# Altium PCB LedMatrix.PcbDoc (part 2 of 3)
Units mm, origin at the board's own origin, x right, y up, seen from the top; angles counter-clockwise.
Board outline 35.93 x 53 mm, 2 copper layers (Top Layer, Bottom Layer), stack 1.611 mm thick; 215 components, 212 nets, 670 pads, 259 vias.
Unrouted connection lines stored in the file: 107.
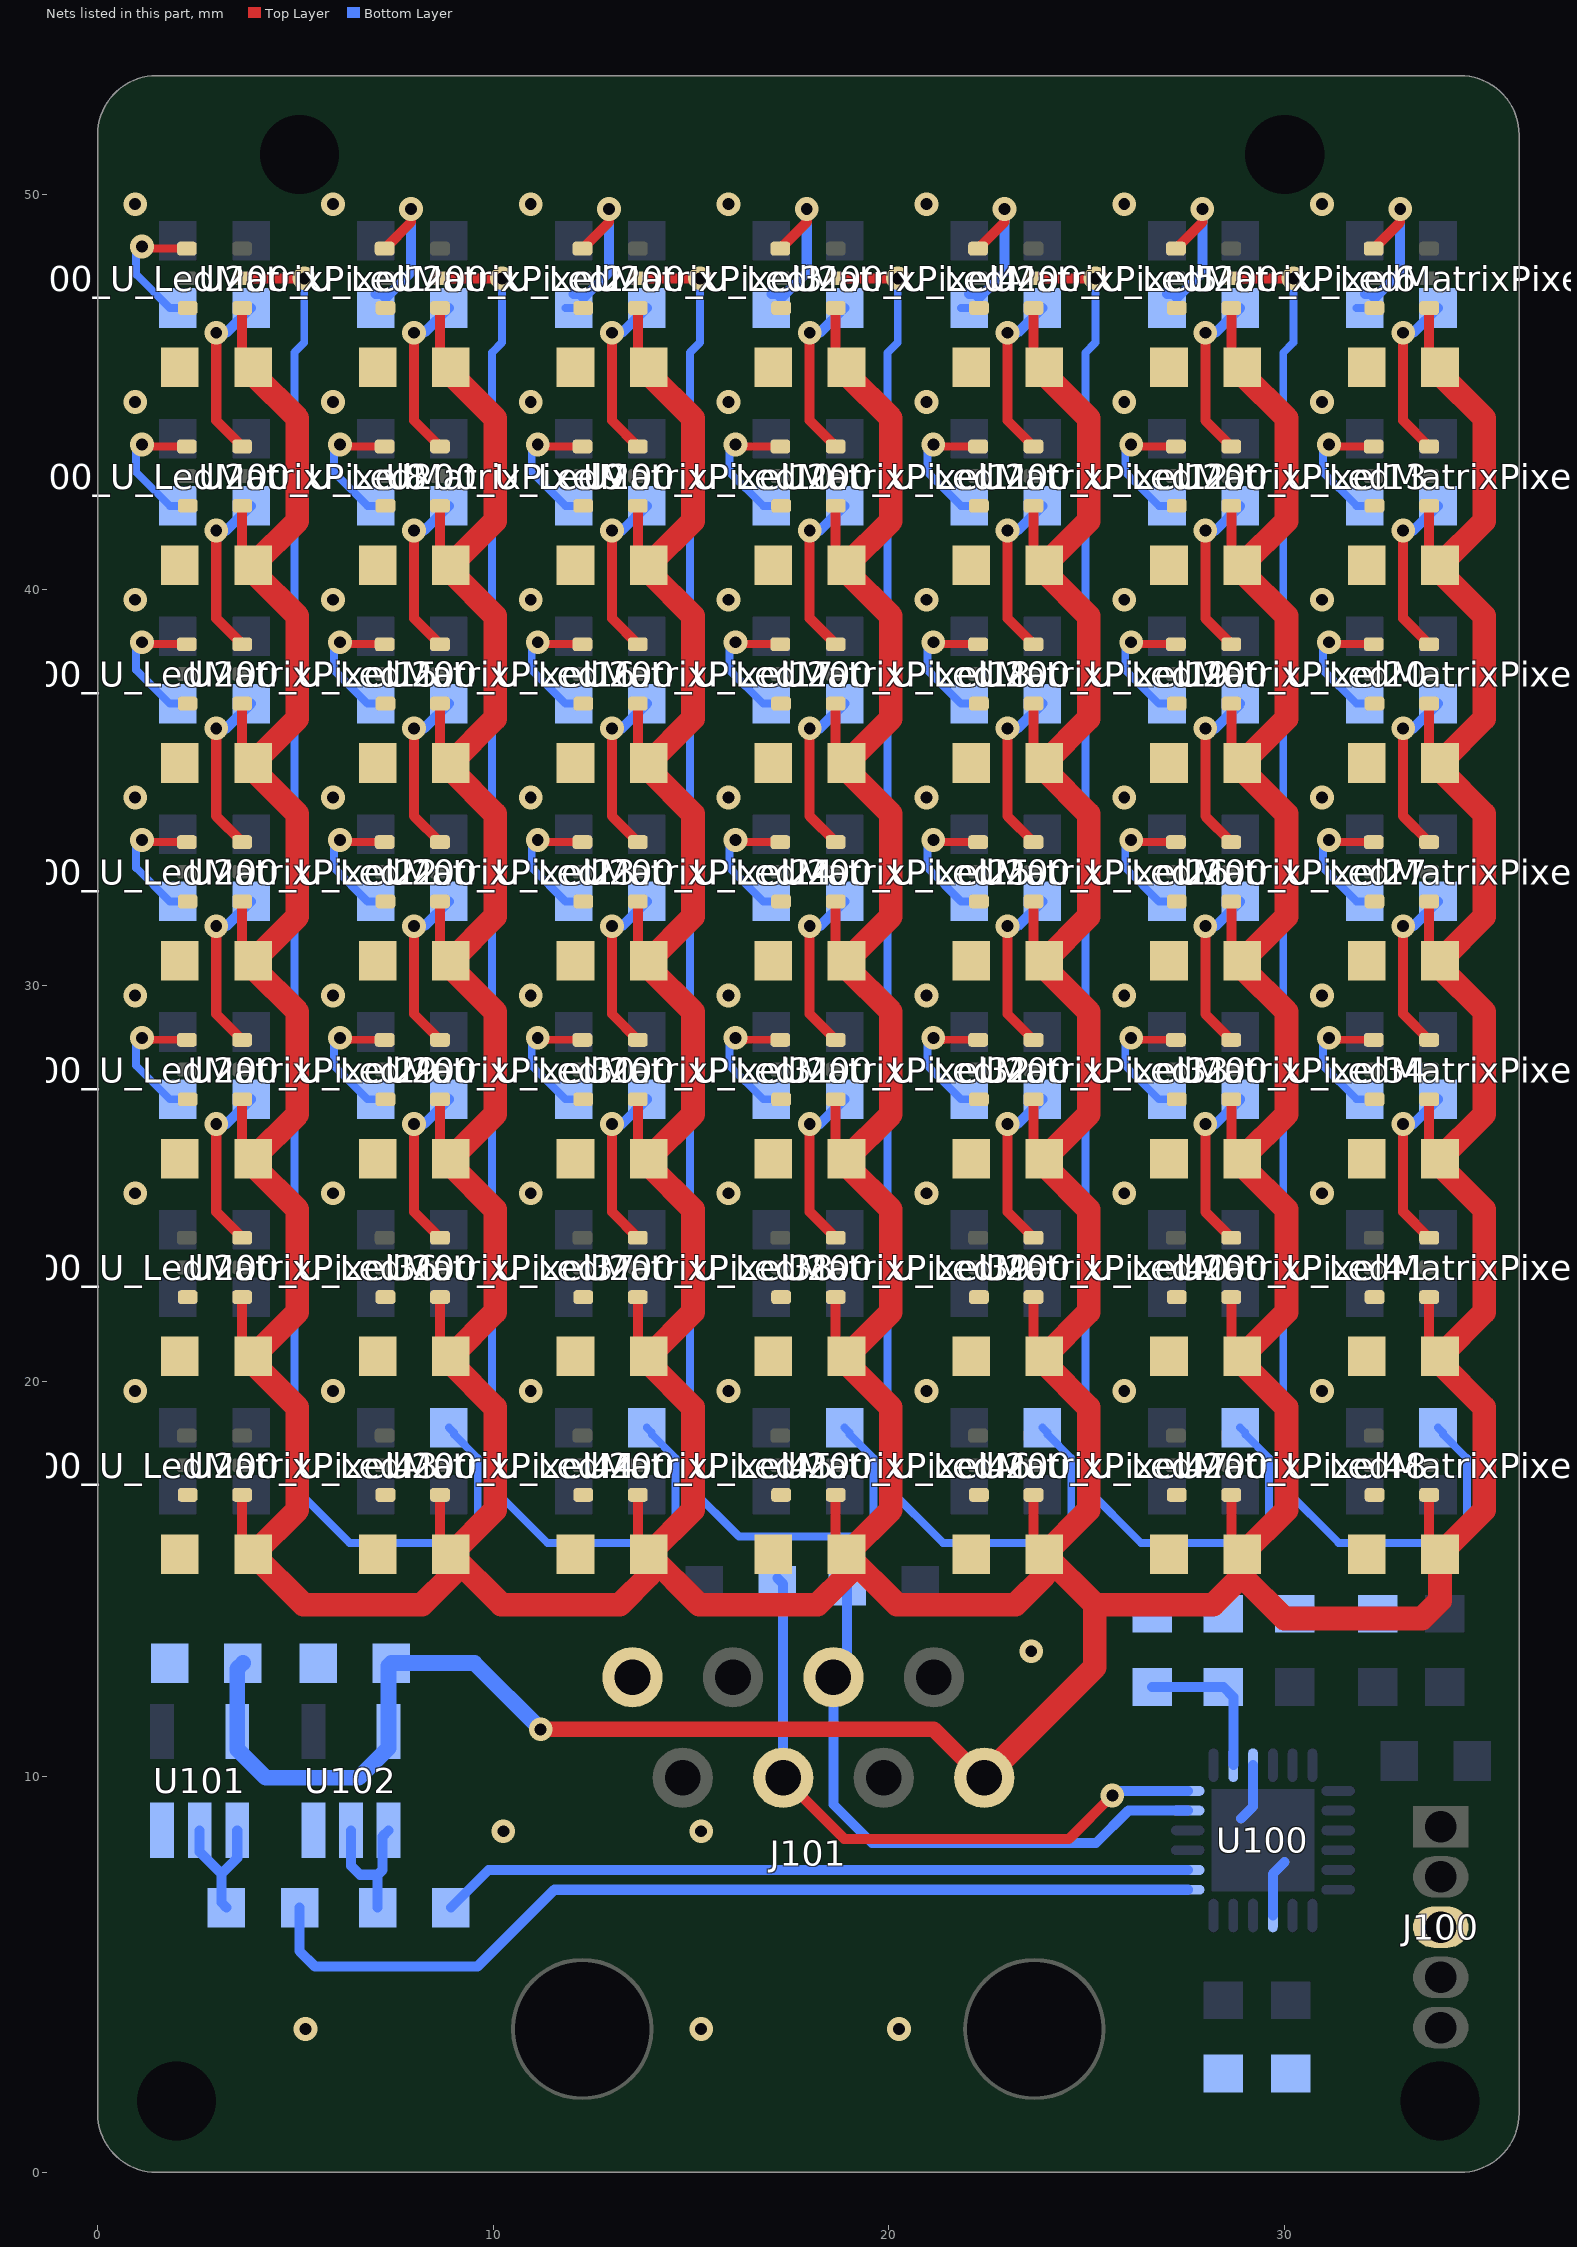
[diagram p2: the nets of this part, all layers, seen from the top]

## Via types
v1: diameter 0.6, hole 0.3, Top Layer to Bottom Layer, tented both sides, 255 vias
v2: diameter 0.5, hole 0.2, Top Layer to Bottom Layer, tented both sides, 4 vias

## Nets (pads, with @x,y where several pads share a name; then routed paths per layer and width w, separated by ;. In a path a pad name is that pad's centre, name@x,y a point inside that pad or via, vN(x,y) a via of type N, cw(c..) or ccw(c..) an arc to the next point about the centre after c; other vN are vias at no path point) (continued)
5V: C107.2 C108.2 C200_U_LedMatrixPixel1.2 C200_U_LedMatrixPixel2.2 C200_U_LedMatrixPixel3.2 C200_U_LedMatrixPixel4.2 C200_U_LedMatrixPixel5.2 C200_U_LedMatrixPixel6.2 C200_U_LedMatrixPixel7.2 C200_U_LedMatrixPixel8.2 C200_U_LedMatrixPixel9.2 C200_U_LedMatrixPixel10.2 C200_U_LedMatrixPixel11.2 C200_U_LedMatrixPixel12.2 C200_U_LedMatrixPixel13.2 C200_U_LedMatrixPixel14.2 C200_U_LedMatrixPixel15.2 C200_U_LedMatrixPixel16.2 C200_U_LedMatrixPixel17.2 C200_U_LedMatrixPixel18.2 C200_U_LedMatrixPixel19.2 C200_U_LedMatrixPixel20.2 C200_U_LedMatrixPixel21.2 C200_U_LedMatrixPixel22.2 C200_U_LedMatrixPixel23.2 C200_U_LedMatrixPixel24.2 C200_U_LedMatrixPixel25.2 C200_U_LedMatrixPixel26.2 C200_U_LedMatrixPixel27.2 C200_U_LedMatrixPixel28.2 C200_U_LedMatrixPixel29.2 C200_U_LedMatrixPixel30.2 C200_U_LedMatrixPixel31.2 C200_U_LedMatrixPixel32.2 C200_U_LedMatrixPixel33.2 C200_U_LedMatrixPixel34.2 C200_U_LedMatrixPixel35.2 C200_U_LedMatrixPixel36.2 C200_U_LedMatrixPixel37.2 C200_U_LedMatrixPixel38.2 C200_U_LedMatrixPixel39.2 C200_U_LedMatrixPixel40.2 C200_U_LedMatrixPixel41.2 C200_U_LedMatrixPixel42.2 C200_U_LedMatrixPixel43.2 C200_U_LedMatrixPixel44.2 C200_U_LedMatrixPixel45.2 C200_U_LedMatrixPixel46.2 C200_U_LedMatrixPixel47.2 C200_U_LedMatrixPixel48.2 C200_U_LedMatrixPixel49.2 J101.1 U101.5 U102.5 U200_U_LedMatrixPixel1.4 U200_U_LedMatrixPixel2.4 U200_U_LedMatrixPixel3.4 U200_U_LedMatrixPixel4.4 U200_U_LedMatrixPixel5.4 U200_U_LedMatrixPixel6.4 U200_U_LedMatrixPixel7.4 U200_U_LedMatrixPixel8.4 U200_U_LedMatrixPixel9.4 U200_U_LedMatrixPixel10.4 U200_U_LedMatrixPixel11.4 U200_U_LedMatrixPixel12.4 U200_U_LedMatrixPixel13.4 U200_U_LedMatrixPixel14.4 U200_U_LedMatrixPixel15.4 U200_U_LedMatrixPixel16.4 U200_U_LedMatrixPixel17.4 U200_U_LedMatrixPixel18.4 U200_U_LedMatrixPixel19.4 U200_U_LedMatrixPixel20.4 U200_U_LedMatrixPixel21.4 U200_U_LedMatrixPixel22.4 U200_U_LedMatrixPixel23.4 U200_U_LedMatrixPixel24.4 U200_U_LedMatrixPixel25.4 U200_U_LedMatrixPixel26.4 U200_U_LedMatrixPixel27.4 U200_U_LedMatrixPixel28.4 U200_U_LedMatrixPixel29.4 U200_U_LedMatrixPixel30.4 U200_U_LedMatrixPixel31.4 U200_U_LedMatrixPixel32.4 U200_U_LedMatrixPixel33.4 U200_U_LedMatrixPixel34.4 U200_U_LedMatrixPixel35.4 U200_U_LedMatrixPixel36.4 U200_U_LedMatrixPixel37.4 U200_U_LedMatrixPixel38.4 U200_U_LedMatrixPixel39.4 U200_U_LedMatrixPixel40.4 U200_U_LedMatrixPixel41.4 U200_U_LedMatrixPixel42.4 U200_U_LedMatrixPixel43.4 U200_U_LedMatrixPixel44.4 U200_U_LedMatrixPixel45.4 U200_U_LedMatrixPixel46.4 U200_U_LedMatrixPixel47.4 U200_U_LedMatrixPixel48.4 U200_U_LedMatrixPixel49.4 | length 382
  Top Layer w0.254: U200_U_LedMatrixPixel43.4@3.656,17.125 3.656,15.9 C200_U_LedMatrixPixel43.2@3.931,15.625 ; C200_U_LedMatrixPixel36.2@3.656,20.9 U200_U_LedMatrixPixel36.4@3.656,22.125 ; C200_U_LedMatrixPixel29.2@3.656,25.9 U200_U_LedMatrixPixel29.4@3.656,27.125 ; C200_U_LedMatrixPixel22.2@3.656,30.9 U200_U_LedMatrixPixel22.4@3.656,32.125 ; C200_U_LedMatrixPixel15.2@3.656,35.9 U200_U_LedMatrixPixel15.4@3.656,37.125 ; C200_U_LedMatrixPixel8.2@3.656,40.9 U200_U_LedMatrixPixel8.4@3.656,42.125 ; C200_U_LedMatrixPixel1.2@3.656,45.9 U200_U_LedMatrixPixel1.4@3.656,47.125 ; U200_U_LedMatrixPixel44.4@8.656,17.125 8.656,15.9 C200_U_LedMatrixPixel44.2@8.931,15.625 ; C200_U_LedMatrixPixel37.2@8.656,20.9 U200_U_LedMatrixPixel37.4@8.656,22.125 ; C200_U_LedMatrixPixel30.2@8.656,25.9 U200_U_LedMatrixPixel30.4@8.656,27.125 ; C200_U_LedMatrixPixel23.2@8.656,30.9 U200_U_LedMatrixPixel23.4@8.656,32.125 ; C200_U_LedMatrixPixel16.2@8.656,35.9 U200_U_LedMatrixPixel16.4@8.656,37.125 ; C200_U_LedMatrixPixel9.2@8.656,40.9 U200_U_LedMatrixPixel9.4@8.656,42.125 ; C200_U_LedMatrixPixel2.2@8.656,45.9 U200_U_LedMatrixPixel2.4@8.656,47.125 ; U200_U_LedMatrixPixel45.4@13.656,17.125 13.656,15.9 C200_U_LedMatrixPixel45.2@13.931,15.625 ; C200_U_LedMatrixPixel38.2@13.656,20.9 U200_U_LedMatrixPixel38.4@13.656,22.125 ; C200_U_LedMatrixPixel31.2@13.656,25.9 U200_U_LedMatrixPixel31.4@13.656,27.125 ; C200_U_LedMatrixPixel24.2@13.656,30.9 U200_U_LedMatrixPixel24.4@13.656,32.125 ; C200_U_LedMatrixPixel17.2@13.656,35.9 U200_U_LedMatrixPixel17.4@13.656,37.125 ; C200_U_LedMatrixPixel10.2@13.656,40.9 U200_U_LedMatrixPixel10.4@13.656,42.125 ; C200_U_LedMatrixPixel3.2@13.656,45.9 U200_U_LedMatrixPixel3.4@13.656,47.125 ; U200_U_LedMatrixPixel46.4@18.656,17.125 18.656,15.9 C200_U_LedMatrixPixel46.2@18.931,15.625 ; C200_U_LedMatrixPixel39.2@18.656,20.9 U200_U_LedMatrixPixel39.4@18.656,22.125 ; C200_U_LedMatrixPixel32.2@18.656,25.9 U200_U_LedMatrixPixel32.4@18.656,27.125 ; C200_U_LedMatrixPixel25.2@18.656,30.9 U200_U_LedMatrixPixel25.4@18.656,32.125 ; C200_U_LedMatrixPixel18.2@18.656,35.9 U200_U_LedMatrixPixel18.4@18.656,37.125 ; C200_U_LedMatrixPixel11.2@18.656,40.9 U200_U_LedMatrixPixel11.4@18.656,42.125 ; C200_U_LedMatrixPixel4.2@18.656,45.9 U200_U_LedMatrixPixel4.4@18.656,47.125 ; U200_U_LedMatrixPixel47.4@23.656,17.125 23.656,15.9 C200_U_LedMatrixPixel47.2@23.931,15.625 ; C200_U_LedMatrixPixel40.2@23.656,20.9 U200_U_LedMatrixPixel40.4@23.656,22.125 ; C200_U_LedMatrixPixel33.2@23.656,25.9 U200_U_LedMatrixPixel33.4@23.656,27.125 ; C200_U_LedMatrixPixel26.2@23.656,30.9 U200_U_LedMatrixPixel26.4@23.656,32.125 ; C200_U_LedMatrixPixel19.2@23.656,35.9 U200_U_LedMatrixPixel19.4@23.656,37.125 ; C200_U_LedMatrixPixel12.2@23.656,40.9 U200_U_LedMatrixPixel12.4@23.656,42.125 ; C200_U_LedMatrixPixel5.2@23.656,45.9 U200_U_LedMatrixPixel5.4@23.656,47.125 ; U200_U_LedMatrixPixel48.4@28.656,17.125 28.656,15.9 C200_U_LedMatrixPixel48.2@28.931,15.625 ; C200_U_LedMatrixPixel41.2@28.656,20.9 U200_U_LedMatrixPixel41.4@28.656,22.125 ; C200_U_LedMatrixPixel34.2@28.656,25.9 U200_U_LedMatrixPixel34.4@28.656,27.125 ; C200_U_LedMatrixPixel27.2@28.656,30.9 U200_U_LedMatrixPixel27.4@28.656,32.125 ; C200_U_LedMatrixPixel20.2@28.656,35.9 U200_U_LedMatrixPixel20.4@28.656,37.125 ; C200_U_LedMatrixPixel13.2@28.656,40.9 U200_U_LedMatrixPixel13.4@28.656,42.125 ; C200_U_LedMatrixPixel6.2@28.656,45.9 U200_U_LedMatrixPixel6.4@28.656,47.125 ; C200_U_LedMatrixPixel49.2@33.931,15.625 C200_U_LedMatrixPixel49.2@33.656,15.9 ; C200_U_LedMatrixPixel49.2@33.656,15.9 U200_U_LedMatrixPixel49.4@33.656,17.125 C200_U_LedMatrixPixel49.2@33.656,15.9 ; C200_U_LedMatrixPixel42.2@33.656,20.9 U200_U_LedMatrixPixel42.4@33.656,22.125 C200_U_LedMatrixPixel42.2@33.656,20.9 ; C200_U_LedMatrixPixel35.2@33.656,25.9 U200_U_LedMatrixPixel35.4@33.656,27.125 C200_U_LedMatrixPixel35.2@33.656,25.9 ; C200_U_LedMatrixPixel28.2@33.656,30.9 U200_U_LedMatrixPixel28.4@33.656,32.125 C200_U_LedMatrixPixel28.2@33.656,30.9 ; C200_U_LedMatrixPixel21.2@33.656,35.9 U200_U_LedMatrixPixel21.4@33.656,37.125 C200_U_LedMatrixPixel21.2@33.656,35.9 ; C200_U_LedMatrixPixel14.2@33.656,40.9 U200_U_LedMatrixPixel14.4@33.656,42.125 C200_U_LedMatrixPixel14.2@33.656,40.9 ; C200_U_LedMatrixPixel7.2@33.656,45.9 U200_U_LedMatrixPixel7.4@33.656,47.125 C200_U_LedMatrixPixel7.2@33.656,45.9
  Top Layer w0.4: v1(11.2,11.2) 21.135,11.2 22.36,9.975 J101.1@22.41,9.975
  Top Layer w0.6: C200_U_LedMatrixPixel36.2@3.931,20.458 5.05,19.339 5.05,16.744 C200_U_LedMatrixPixel43.2@3.931,15.625 5.206,14.35 8.2,14.35 8.931,15.081 C200_U_LedMatrixPixel44.2@8.931,15.625 ; C200_U_LedMatrixPixel36.2@3.931,20.625 5.05,21.744 5.05,24.339 C200_U_LedMatrixPixel29.2@3.931,25.458 ; C200_U_LedMatrixPixel29.2@3.931,25.625 5.05,26.744 5.05,29.339 C200_U_LedMatrixPixel22.2@3.931,30.458 ; C200_U_LedMatrixPixel22.2@3.931,30.625 5.05,31.744 5.05,34.339 C200_U_LedMatrixPixel15.2@3.931,35.458 ; C200_U_LedMatrixPixel15.2@3.931,35.625 5.05,36.744 5.05,39.339 C200_U_LedMatrixPixel8.2@3.931,40.458 ; C200_U_LedMatrixPixel8.2@3.931,40.625 5.05,41.744 5.05,44.339 3.931,45.458 C200_U_LedMatrixPixel1.2@3.931,45.625 ; C200_U_LedMatrixPixel37.2@8.931,20.458 10.05,19.339 10.05,16.744 C200_U_LedMatrixPixel44.2@8.931,15.625 ; C200_U_LedMatrixPixel37.2@8.931,20.625 10.05,21.744 10.05,24.339 C200_U_LedMatrixPixel30.2@8.931,25.458 ; C200_U_LedMatrixPixel30.2@8.931,25.625 10.05,26.744 10.05,29.339 C200_U_LedMatrixPixel23.2@8.931,30.458 ; C200_U_LedMatrixPixel23.2@8.931,30.625 10.05,31.744 10.05,34.339 C200_U_LedMatrixPixel16.2@8.931,35.458 ; C200_U_LedMatrixPixel16.2@8.931,35.625 10.05,36.744 10.05,39.339 C200_U_LedMatrixPixel9.2@8.931,40.458 ; C200_U_LedMatrixPixel9.2@8.931,40.625 10.05,41.744 10.05,44.339 8.931,45.458 C200_U_LedMatrixPixel2.2@8.931,45.625 ; 13.931,15.081 13.2,14.35 10.206,14.35 C200_U_LedMatrixPixel44.2@8.931,15.625 ; C200_U_LedMatrixPixel38.2@13.931,20.458 15.05,19.339 15.05,16.744 C200_U_LedMatrixPixel45.2@13.931,15.625 15.206,14.35 18.2,14.35 18.931,15.081 ; C200_U_LedMatrixPixel38.2@13.931,20.625 15.05,21.744 15.05,24.339 C200_U_LedMatrixPixel31.2@13.931,25.458 ; C200_U_LedMatrixPixel31.2@13.931,25.625 15.05,26.744 15.05,29.339 C200_U_LedMatrixPixel24.2@13.931,30.458 ; C200_U_LedMatrixPixel24.2@13.931,30.625 15.05,31.744 15.05,34.339 C200_U_LedMatrixPixel17.2@13.931,35.458 ; C200_U_LedMatrixPixel17.2@13.931,35.625 15.05,36.744 15.05,39.339 C200_U_LedMatrixPixel10.2@13.931,40.458 ; C200_U_LedMatrixPixel10.2@13.931,40.625 15.05,41.744 15.05,44.339 13.931,45.458 C200_U_LedMatrixPixel3.2@13.931,45.625 ; C200_U_LedMatrixPixel39.2@18.931,20.458 20.05,19.339 20.05,16.744 C200_U_LedMatrixPixel46.2@18.931,15.625 20.206,14.35 23.2,14.35 23.931,15.081 ; C200_U_LedMatrixPixel39.2@18.931,20.625 20.05,21.744 20.05,24.339 C200_U_LedMatrixPixel32.2@18.931,25.458 ; C200_U_LedMatrixPixel32.2@18.931,25.625 20.05,26.744 20.05,29.339 C200_U_LedMatrixPixel25.2@18.931,30.458 ; C200_U_LedMatrixPixel25.2@18.931,30.625 20.05,31.744 20.05,34.339 C200_U_LedMatrixPixel18.2@18.931,35.458 ; C200_U_LedMatrixPixel18.2@18.931,35.625 20.05,36.744 20.05,39.339 C200_U_LedMatrixPixel11.2@18.931,40.458 ; C200_U_LedMatrixPixel11.2@18.931,40.625 20.05,41.744 20.05,44.339 18.931,45.458 C200_U_LedMatrixPixel4.2@18.931,45.625 ; J101.1@22.41,9.975 25.206,12.771 25.206,14.35 ; C200_U_LedMatrixPixel40.2@23.931,20.458 25.05,19.339 25.05,16.744 C200_U_LedMatrixPixel47.2@23.931,15.625 25.206,14.35 ; C200_U_LedMatrixPixel40.2@23.931,20.625 25.05,21.744 25.05,24.339 C200_U_LedMatrixPixel33.2@23.931,25.458 ; C200_U_LedMatrixPixel33.2@23.931,25.625 25.05,26.744 25.05,29.339 C200_U_LedMatrixPixel26.2@23.931,30.458 ; C200_U_LedMatrixPixel26.2@23.931,30.625 25.05,31.744 25.05,34.339 C200_U_LedMatrixPixel19.2@23.931,35.458 ; C200_U_LedMatrixPixel19.2@23.931,35.625 25.05,36.744 25.05,39.339 C200_U_LedMatrixPixel12.2@23.931,40.458 ; C200_U_LedMatrixPixel12.2@23.931,40.625 25.05,41.744 25.05,44.339 23.931,45.458 C200_U_LedMatrixPixel5.2@23.931,45.625 ; 28.931,15.069 30,14 33.479,14 33.931,14.452 C200_U_LedMatrixPixel49.2@33.931,15.625 35.05,16.744 35.05,19.339 C200_U_LedMatrixPixel42.2@33.931,20.458 ; C200_U_LedMatrixPixel41.2@28.931,20.458 30.05,19.339 30.05,16.744 C200_U_LedMatrixPixel48.2@28.931,15.625 28.931,15.081 28.2,14.35 25.206,14.35 ; C200_U_LedMatrixPixel41.2@28.931,20.625 30.05,21.744 30.05,24.339 C200_U_LedMatrixPixel34.2@28.931,25.458 ; C200_U_LedMatrixPixel34.2@28.931,25.625 30.05,26.744 30.05,29.339 C200_U_LedMatrixPixel27.2@28.931,30.458 ; C200_U_LedMatrixPixel27.2@28.931,30.625 30.05,31.744 30.05,34.339 C200_U_LedMatrixPixel20.2@28.931,35.458 ; C200_U_LedMatrixPixel20.2@28.931,35.625 30.05,36.744 30.05,39.339 C200_U_LedMatrixPixel13.2@28.931,40.458 ; C200_U_LedMatrixPixel13.2@28.931,40.625 30.05,41.744 30.05,44.339 28.931,45.458 C200_U_LedMatrixPixel6.2@28.931,45.625 ; C200_U_LedMatrixPixel42.2@33.931,20.625 35.05,21.744 35.05,24.339 C200_U_LedMatrixPixel35.2@33.931,25.458 ; C200_U_LedMatrixPixel35.2@33.931,25.625 35.05,26.744 35.05,29.339 C200_U_LedMatrixPixel28.2@33.931,30.458 ; C200_U_LedMatrixPixel28.2@33.931,30.625 35.05,31.744 35.05,34.339 C200_U_LedMatrixPixel21.2@33.931,35.458 ; C200_U_LedMatrixPixel21.2@33.931,35.625 35.05,36.744 35.05,39.339 C200_U_LedMatrixPixel14.2@33.931,40.458 ; C200_U_LedMatrixPixel14.2@33.931,40.625 35.05,41.744 35.05,44.339 33.931,45.458 C200_U_LedMatrixPixel7.2@33.931,45.625
  Bottom Layer w0.4: C108.2@3.675,12.875 3.531,12.731 U101.5@3.531,11.145 3.531,10.694 4.25,9.975 6.6,9.975 7.356,10.731 U102.5@7.356,11.145 7.356,12.806 C107.2@7.425,12.875 9.525,12.875 v1(11.2,11.2)
CKO8: R201_U_LedMatrixPixel44.1 U200_U_LedMatrixPixel1.5 | length 40.3
  Top Layer w0.254: U200_U_LedMatrixPixel1.5@3.656,47.875 v1(5.225,47.875)
  Bottom Layer w0.2: v1(5.225,47.875) 5.225,46.25 4.973,45.998 4.973,17.31 6.37,15.913 9.004,15.913 9.61,16.52 9.61,18.054 9.008,18.656 9.008,18.698 R201_U_LedMatrixPixel44.1@8.881,18.825
CKO16: R201_U_LedMatrixPixel45.1 U200_U_LedMatrixPixel2.5 | length 40.3
  Top Layer w0.254: U200_U_LedMatrixPixel2.5@8.656,47.875 v1(10.225,47.875)
  Bottom Layer w0.2: v1(10.225,47.875) 10.225,46.25 9.975,46 9.975,17.308 11.37,15.913 14.004,15.913 14.61,16.52 14.61,18.054 14.008,18.656 14.008,18.698 R201_U_LedMatrixPixel45.1@13.881,18.825
CKO24: R201_U_LedMatrixPixel46.1 U200_U_LedMatrixPixel3.5 | length 40.2
  Top Layer w0.254: U200_U_LedMatrixPixel3.5@13.656,47.875 v1(15.225,47.875)
  Bottom Layer w0.2: v1(15.225,47.875) 15.225,46.25 14.975,46 14.975,17.308 16.212,16.071 19.161,16.071 19.61,16.52 19.61,18.054 19.008,18.656 19.008,18.698 R201_U_LedMatrixPixel46.1@18.881,18.825
CKO32: R201_U_LedMatrixPixel47.1 U200_U_LedMatrixPixel4.5 | length 40.3
  Top Layer w0.254: U200_U_LedMatrixPixel4.5@18.656,47.875 v1(20.225,47.875)
  Bottom Layer w0.2: v1(20.225,47.875) 20.225,46.25 19.968,45.993 19.968,17.315 21.37,15.913 24.004,15.913 24.61,16.52 24.61,18.054 24.008,18.656 24.008,18.698 R201_U_LedMatrixPixel47.1@23.881,18.825
CKO40: R201_U_LedMatrixPixel48.1 U200_U_LedMatrixPixel5.5 | length 40.3
  Top Layer w0.254: U200_U_LedMatrixPixel5.5@23.656,47.875 v1(25.225,47.875)
  Bottom Layer w0.2: v1(25.225,47.875) 25.225,46.25 24.968,45.993 24.968,17.315 26.37,15.913 29.004,15.913 29.61,16.52 29.61,18.054 29.008,18.656 29.008,18.698 R201_U_LedMatrixPixel48.1@28.881,18.825
CKO48: R201_U_LedMatrixPixel49.1 U200_U_LedMatrixPixel6.5 | length 40.3
  Top Layer w0.254: U200_U_LedMatrixPixel6.5@28.656,47.875 v1(30.225,47.875)
  Bottom Layer w0.2: v1(30.225,47.875) 30.225,46.25 29.968,45.993 29.968,17.315 31.37,15.913 34.004,15.913 34.61,16.52 34.61,18.054 34.008,18.656 34.008,18.698 R201_U_LedMatrixPixel49.1@33.881,18.825
GND: C100.1 C101.1 C102.1 C103.1 C104.1 C105.1 C107.1 C108.1 C200_U_LedMatrixPixel1.1 C200_U_LedMatrixPixel2.1 C200_U_LedMatrixPixel3.1 C200_U_LedMatrixPixel4.1 C200_U_LedMatrixPixel5.1 C200_U_LedMatrixPixel6.1 C200_U_LedMatrixPixel7.1 C200_U_LedMatrixPixel8.1 C200_U_LedMatrixPixel9.1 C200_U_LedMatrixPixel10.1 C200_U_LedMatrixPixel11.1 C200_U_LedMatrixPixel12.1 C200_U_LedMatrixPixel13.1 C200_U_LedMatrixPixel14.1 C200_U_LedMatrixPixel15.1 C200_U_LedMatrixPixel16.1 C200_U_LedMatrixPixel17.1 C200_U_LedMatrixPixel18.1 C200_U_LedMatrixPixel19.1 C200_U_LedMatrixPixel20.1 C200_U_LedMatrixPixel21.1 C200_U_LedMatrixPixel22.1 C200_U_LedMatrixPixel23.1 C200_U_LedMatrixPixel24.1 C200_U_LedMatrixPixel25.1 C200_U_LedMatrixPixel26.1 C200_U_LedMatrixPixel27.1 C200_U_LedMatrixPixel28.1 C200_U_LedMatrixPixel29.1 C200_U_LedMatrixPixel30.1 C200_U_LedMatrixPixel31.1 C200_U_LedMatrixPixel32.1 C200_U_LedMatrixPixel33.1 C200_U_LedMatrixPixel34.1 C200_U_LedMatrixPixel35.1 C200_U_LedMatrixPixel36.1 C200_U_LedMatrixPixel37.1 C200_U_LedMatrixPixel38.1 C200_U_LedMatrixPixel39.1 C200_U_LedMatrixPixel40.1 C200_U_LedMatrixPixel41.1 C200_U_LedMatrixPixel42.1 C200_U_LedMatrixPixel43.1 C200_U_LedMatrixPixel44.1 C200_U_LedMatrixPixel45.1 C200_U_LedMatrixPixel46.1 C200_U_LedMatrixPixel47.1 C200_U_LedMatrixPixel48.1 C200_U_LedMatrixPixel49.1 J100.3 J101.8 U100.9 U100.21 U101.3 U102.3 U200_U_LedMatrixPixel1.3 U200_U_LedMatrixPixel2.3 U200_U_LedMatrixPixel3.3 U200_U_LedMatrixPixel4.3 U200_U_LedMatrixPixel5.3 U200_U_LedMatrixPixel6.3 U200_U_LedMatrixPixel7.3 U200_U_LedMatrixPixel8.3 U200_U_LedMatrixPixel9.3 U200_U_LedMatrixPixel10.3 U200_U_LedMatrixPixel11.3 U200_U_LedMatrixPixel12.3 U200_U_LedMatrixPixel13.3 U200_U_LedMatrixPixel14.3 U200_U_LedMatrixPixel15.3 U200_U_LedMatrixPixel16.3 U200_U_LedMatrixPixel17.3 U200_U_LedMatrixPixel18.3 U200_U_LedMatrixPixel19.3 U200_U_LedMatrixPixel20.3 U200_U_LedMatrixPixel21.3 U200_U_LedMatrixPixel22.3 U200_U_LedMatrixPixel23.3 U200_U_LedMatrixPixel24.3 U200_U_LedMatrixPixel25.3 U200_U_LedMatrixPixel26.3 U200_U_LedMatrixPixel27.3 U200_U_LedMatrixPixel28.3 U200_U_LedMatrixPixel29.3 U200_U_LedMatrixPixel30.3 U200_U_LedMatrixPixel31.3 U200_U_LedMatrixPixel32.3 U200_U_LedMatrixPixel33.3 U200_U_LedMatrixPixel34.3 U200_U_LedMatrixPixel35.3 U200_U_LedMatrixPixel36.3 U200_U_LedMatrixPixel37.3 U200_U_LedMatrixPixel38.3 U200_U_LedMatrixPixel39.3 U200_U_LedMatrixPixel40.3 U200_U_LedMatrixPixel41.3 U200_U_LedMatrixPixel42.3 U200_U_LedMatrixPixel43.3 U200_U_LedMatrixPixel44.3 U200_U_LedMatrixPixel45.3 U200_U_LedMatrixPixel46.3 U200_U_LedMatrixPixel47.3 U200_U_LedMatrixPixel48.3 U200_U_LedMatrixPixel49.3 | length 2.9
  Bottom Layer w0.254: 28.906,8.945 29.206,9.245 U100.21@29.206,10.295 ; U100.9@29.706,6.495 29.706,7.545 30.006,7.845
  other v1: 5.256,3.625 15.256,3.625 20.256,3.625 10.256,8.625 15.256,8.625 23.6,13.175 0.95,19.75 5.95,19.75 10.95,19.75 15.95,19.75 20.95,19.75 25.95,19.75 30.95,19.75 0.95,24.75 5.95,24.75 10.95,24.75 15.95,24.75 20.95,24.75 25.95,24.75 30.95,24.75 0.95,29.75 5.95,29.75 10.95,29.75 15.95,29.75 20.95,29.75 25.95,29.75 30.95,29.75 0.95,34.75 5.95,34.75 10.95,34.75 15.95,34.75 20.95,34.75 25.95,34.75 30.95,34.75 0.95,39.75 5.95,39.75 10.95,39.75 15.95,39.75 20.95,39.75 25.95,39.75 30.95,39.75 0.95,44.75 5.95,44.75 10.95,44.75 15.95,44.75 20.95,44.75 25.95,44.75 30.95,44.75 0.95,49.75 5.95,49.75 10.95,49.75 15.95,49.75 20.95,49.75 25.95,49.75 30.95,49.75
LED_CKI: R105.1 U100.14 | length 19
  Bottom Layer w0.254: R105.1@8.931,6.695 9.881,7.645 U100.14@27.556,7.645
LED_SDI: R104.1 U100.13 | length 24.5
  Bottom Layer w0.254: R104.1@5.106,6.695 5.106,5.594 5.5,5.2 9.6,5.2 11.545,7.145 U100.13@27.556,7.145
MCU_SCL: J101.5 R103.1 U100.18 | length 16.5
  Top Layer w0.254: J101.5@17.33,9.975 18.873,8.432 24.557,8.432 v1(25.65,9.525)
  Bottom Layer w0.254: R103.1@17.181,15.025 17.33,14.876 J101.5@17.33,9.975 ; v1(25.65,9.525) 25.77,9.645 U100.18@27.556,9.645
MCU_SDA: J101.4 R102.1 U100.17 | length 15.6
  Bottom Layer w0.254: R102.1@18.945,15.025 R102.1@18.945,14.825 18.945,12.86 J101.4@18.6,12.515 18.6,9.301 19.576,8.325 25.233,8.325 26.052,9.144 27.555,9.144 U100.17@27.556,9.145
NetC101_2: C101.2 C102.2 U100.20 | length 3.9
  Bottom Layer w0.254: C101.2@26.656,12.27 C102.2@28.456,12.27 28.706,12.02 U100.20@28.706,10.295
NetR104_2: R104.2 U101.1 U101.2 | length 3.5
  Bottom Layer w0.254: U101.2@2.581,8.645 2.581,8.1 3.131,7.55 ; R104.2@3.256,6.695 3.131,6.82 3.131,7.55 ; U101.1@3.531,8.645 3.531,7.95 3.131,7.55
NetR105_2: R105.2 U102.1 U102.2 | length 3.7
  Bottom Layer w0.254: U102.2@6.406,8.645 6.406,7.75 6.631,7.525 7.081,7.525 ; R105.2@7.081,6.695 7.081,7.525 ; U102.1@7.356,8.645 7.206,8.495 7.206,7.65 7.081,7.525
NetR200_U_LedMatrixPixel1_1: R200_U_LedMatrixPixel1.1 U200_U_LedMatrixPixel8.6 | length 4.3
  Top Layer w0.254: v1(3,46.5) 3,44.281 U200_U_LedMatrixPixel8.6@3.656,43.625
  Bottom Layer w0.254: v1(3,46.5) 3.256,46.5 R200_U_LedMatrixPixel1.1@3.881,47.125
NetR200_U_LedMatrixPixel1_2: R200_U_LedMatrixPixel1.2 U200_U_LedMatrixPixel1.1 | length 3.3
  Top Layer w0.2: v1(1.125,48.677) 1.125,48.65 1.15,48.625 1.378,48.625 1.382,48.629 2.252,48.629 U200_U_LedMatrixPixel1.1@2.256,48.625
  Bottom Layer w0.2: v1(1.125,48.677) 0.975,48.527 0.975,47.975 1.825,47.125 R200_U_LedMatrixPixel1.2@2.031,47.125
NetR200_U_LedMatrixPixel2_1: R200_U_LedMatrixPixel2.1 U200_U_LedMatrixPixel9.6 | length 4.3
  Top Layer w0.254: v1(8,46.5) 8,44.281 U200_U_LedMatrixPixel9.6@8.656,43.625
  Bottom Layer w0.254: v1(8,46.5) 8.256,46.5 R200_U_LedMatrixPixel2.1@8.881,47.125
NetR200_U_LedMatrixPixel2_2: R200_U_LedMatrixPixel2.2 U200_U_LedMatrixPixel2.1 | length 4.1
  Top Layer w0.254: U200_U_LedMatrixPixel2.1@7.256,48.625 7.925,49.294 v1(7.925,49.625)
  Bottom Layer w0.254: R200_U_LedMatrixPixel2.2@7.031,47.479 7.178,47.479 7.281,47.375 7.925,48.019 v1(7.925,49.625)
NetR200_U_LedMatrixPixel3_1: R200_U_LedMatrixPixel3.1 U200_U_LedMatrixPixel10.6 | length 4.3
  Top Layer w0.254: v1(13,46.5) 13,44.281 U200_U_LedMatrixPixel10.6@13.656,43.625
  Bottom Layer w0.254: v1(13,46.5) 13.256,46.5 R200_U_LedMatrixPixel3.1@13.881,47.125
NetR200_U_LedMatrixPixel3_2: R200_U_LedMatrixPixel3.2 U200_U_LedMatrixPixel3.1 | length 4.3
  Top Layer w0.254: U200_U_LedMatrixPixel3.1@12.256,48.625 12.925,49.294 v1(12.925,49.625)
  Bottom Layer w0.2: R200_U_LedMatrixPixel3.2@11.825,47.125 R200_U_LedMatrixPixel3.2@12.031,47.125
  Bottom Layer w0.254: R200_U_LedMatrixPixel3.2@12.031,47.479 12.178,47.479 12.281,47.375 12.925,48.019 v1(12.925,49.625)
NetR200_U_LedMatrixPixel4_1: R200_U_LedMatrixPixel4.1 U200_U_LedMatrixPixel11.6 | length 4.3
  Top Layer w0.254: v1(18,46.5) 18,44.281 U200_U_LedMatrixPixel11.6@18.656,43.625
  Bottom Layer w0.254: v1(18,46.5) 18.256,46.5 R200_U_LedMatrixPixel4.1@18.881,47.125
NetR200_U_LedMatrixPixel4_2: R200_U_LedMatrixPixel4.2 U200_U_LedMatrixPixel4.1 | length 4.1
  Top Layer w0.254: U200_U_LedMatrixPixel4.1@17.256,48.625 17.925,49.294 v1(17.925,49.625)
  Bottom Layer w0.254: R200_U_LedMatrixPixel4.2@17.031,47.479 17.178,47.479 17.281,47.375 17.925,48.019 v1(17.925,49.625)
NetR200_U_LedMatrixPixel5_1: R200_U_LedMatrixPixel5.1 U200_U_LedMatrixPixel12.6 | length 4.3
  Top Layer w0.254: v1(23,46.5) 23,44.281 U200_U_LedMatrixPixel12.6@23.656,43.625
  Bottom Layer w0.254: v1(23,46.5) 23.256,46.5 R200_U_LedMatrixPixel5.1@23.881,47.125
NetR200_U_LedMatrixPixel5_2: R200_U_LedMatrixPixel5.2 U200_U_LedMatrixPixel5.1 | length 4.3
  Top Layer w0.254: U200_U_LedMatrixPixel5.1@22.256,48.625 22.925,49.294 v1(22.925,49.625)
  Bottom Layer w0.2: R200_U_LedMatrixPixel5.2@21.825,47.125 R200_U_LedMatrixPixel5.2@22.031,47.125
  Bottom Layer w0.254: R200_U_LedMatrixPixel5.2@22.031,47.479 22.178,47.479 22.281,47.375 22.925,48.019 v1(22.925,49.625)
NetR200_U_LedMatrixPixel6_1: R200_U_LedMatrixPixel6.1 U200_U_LedMatrixPixel13.6 | length 4.3
  Top Layer w0.254: v1(28,46.5) 28,44.281 U200_U_LedMatrixPixel13.6@28.656,43.625
  Bottom Layer w0.254: v1(28,46.5) 28.256,46.5 R200_U_LedMatrixPixel6.1@28.881,47.125
NetR200_U_LedMatrixPixel6_2: R200_U_LedMatrixPixel6.2 U200_U_LedMatrixPixel6.1 | length 4.1
  Top Layer w0.254: U200_U_LedMatrixPixel6.1@27.256,48.625 27.925,49.294 v1(27.925,49.625)
  Bottom Layer w0.254: R200_U_LedMatrixPixel6.2@27.031,47.479 27.178,47.479 27.281,47.375 27.925,48.019 v1(27.925,49.625)
NetR200_U_LedMatrixPixel7_1: R200_U_LedMatrixPixel7.1 U200_U_LedMatrixPixel14.6 | length 4.3
  Top Layer w0.254: v1(33,46.5) 33,44.281 U200_U_LedMatrixPixel14.6@33.656,43.625
  Bottom Layer w0.254: v1(33,46.5) 33.256,46.5 R200_U_LedMatrixPixel7.1@33.881,47.125
NetR200_U_LedMatrixPixel7_2: R200_U_LedMatrixPixel7.2 U200_U_LedMatrixPixel7.1 | length 4.3
  Top Layer w0.254: U200_U_LedMatrixPixel7.1@32.256,48.625 32.925,49.294 v1(32.925,49.625)
  Bottom Layer w0.2: R200_U_LedMatrixPixel7.2@31.825,47.125 R200_U_LedMatrixPixel7.2@32.031,47.125
  Bottom Layer w0.254: R200_U_LedMatrixPixel7.2@32.031,47.479 32.178,47.479 32.281,47.375 32.925,48.019 v1(32.925,49.625)
NetR200_U_LedMatrixPixel8_1: R200_U_LedMatrixPixel8.1 U200_U_LedMatrixPixel15.6 | length 4.3
  Top Layer w0.254: v1(3,41.5) 3,39.281 U200_U_LedMatrixPixel15.6@3.656,38.625
  Bottom Layer w0.254: v1(3,41.5) 3.256,41.5 R200_U_LedMatrixPixel8.1@3.881,42.125
NetR200_U_LedMatrixPixel8_2: R200_U_LedMatrixPixel8.2 U200_U_LedMatrixPixel8.1 | length 3.3
  Top Layer w0.2: v1(1.125,43.677) 1.125,43.65 1.15,43.625 1.378,43.625 1.382,43.629 2.252,43.629 U200_U_LedMatrixPixel8.1@2.256,43.625
  Bottom Layer w0.2: v1(1.125,43.677) 0.975,43.527 0.975,42.975 1.825,42.125 R200_U_LedMatrixPixel8.2@2.031,42.125
NetR200_U_LedMatrixPixel9_1: R200_U_LedMatrixPixel9.1 U200_U_LedMatrixPixel16.6 | length 4.3
  Top Layer w0.254: v1(8,41.5) 8,39.281 U200_U_LedMatrixPixel16.6@8.656,38.625
  Bottom Layer w0.254: v1(8,41.5) 8.256,41.5 R200_U_LedMatrixPixel9.1@8.881,42.125
NetR200_U_LedMatrixPixel9_2: R200_U_LedMatrixPixel9.2 U200_U_LedMatrixPixel9.1 | length 3.3
  Top Layer w0.2: v1(6.125,43.677) 6.125,43.65 6.15,43.625 6.378,43.625 6.382,43.629 7.252,43.629 U200_U_LedMatrixPixel9.1@7.256,43.625
  Bottom Layer w0.2: v1(6.125,43.677) 5.975,43.527 5.975,42.975 6.825,42.125 R200_U_LedMatrixPixel9.2@7.031,42.125
NetR200_U_LedMatrixPixel10_1: R200_U_LedMatrixPixel10.1 U200_U_LedMatrixPixel17.6 | length 4.3
  Top Layer w0.254: v1(13,41.5) 13,39.281 U200_U_LedMatrixPixel17.6@13.656,38.625
  Bottom Layer w0.254: v1(13,41.5) 13.256,41.5 R200_U_LedMatrixPixel10.1@13.881,42.125
NetR200_U_LedMatrixPixel10_2: R200_U_LedMatrixPixel10.2 U200_U_LedMatrixPixel10.1 | length 3.3
  Top Layer w0.2: v1(11.125,43.677) 11.125,43.65 11.15,43.625 11.378,43.625 11.382,43.629 12.252,43.629 U200_U_LedMatrixPixel10.1@12.256,43.625
  Bottom Layer w0.2: v1(11.125,43.677) 10.975,43.527 10.975,42.975 11.825,42.125 R200_U_LedMatrixPixel10.2@12.031,42.125
NetR200_U_LedMatrixPixel11_1: R200_U_LedMatrixPixel11.1 U200_U_LedMatrixPixel18.6 | length 4.3
  Top Layer w0.254: v1(18,41.5) 18,39.281 U200_U_LedMatrixPixel18.6@18.656,38.625
  Bottom Layer w0.254: v1(18,41.5) 18.256,41.5 R200_U_LedMatrixPixel11.1@18.881,42.125
NetR200_U_LedMatrixPixel11_2: R200_U_LedMatrixPixel11.2 U200_U_LedMatrixPixel11.1 | length 3.3
  Top Layer w0.2: v1(16.125,43.677) 16.125,43.65 16.15,43.625 16.378,43.625 16.382,43.629 17.252,43.629 U200_U_LedMatrixPixel11.1@17.256,43.625
  Bottom Layer w0.2: v1(16.125,43.677) 15.975,43.527 15.975,42.975 16.825,42.125 R200_U_LedMatrixPixel11.2@17.031,42.125
NetR200_U_LedMatrixPixel12_1: R200_U_LedMatrixPixel12.1 U200_U_LedMatrixPixel19.6 | length 4.3
  Top Layer w0.254: v1(23,41.5) 23,39.281 U200_U_LedMatrixPixel19.6@23.656,38.625
  Bottom Layer w0.254: v1(23,41.5) 23.256,41.5 R200_U_LedMatrixPixel12.1@23.881,42.125
NetR200_U_LedMatrixPixel12_2: R200_U_LedMatrixPixel12.2 U200_U_LedMatrixPixel12.1 | length 3.3
  Top Layer w0.2: v1(21.125,43.677) 21.125,43.65 21.15,43.625 21.378,43.625 21.382,43.629 22.252,43.629 U200_U_LedMatrixPixel12.1@22.256,43.625
  Bottom Layer w0.2: v1(21.125,43.677) 20.975,43.527 20.975,42.975 21.825,42.125 R200_U_LedMatrixPixel12.2@22.031,42.125
NetR200_U_LedMatrixPixel13_1: R200_U_LedMatrixPixel13.1 U200_U_LedMatrixPixel20.6 | length 4.3
  Top Layer w0.254: v1(28,41.5) 28,39.281 U200_U_LedMatrixPixel20.6@28.656,38.625
  Bottom Layer w0.254: v1(28,41.5) 28.256,41.5 R200_U_LedMatrixPixel13.1@28.881,42.125
NetR200_U_LedMatrixPixel13_2: R200_U_LedMatrixPixel13.2 U200_U_LedMatrixPixel13.1 | length 3.3
  Top Layer w0.2: v1(26.125,43.677) 26.125,43.65 26.15,43.625 26.378,43.625 26.382,43.629 27.252,43.629 U200_U_LedMatrixPixel13.1@27.256,43.625
  Bottom Layer w0.2: v1(26.125,43.677) 25.975,43.527 25.975,42.975 26.825,42.125 R200_U_LedMatrixPixel13.2@27.031,42.125
NetR200_U_LedMatrixPixel14_1: R200_U_LedMatrixPixel14.1 U200_U_LedMatrixPixel21.6 | length 4.3
  Top Layer w0.254: v1(33,41.5) 33,39.281 U200_U_LedMatrixPixel21.6@33.656,38.625
  Bottom Layer w0.254: v1(33,41.5) 33.256,41.5 R200_U_LedMatrixPixel14.1@33.881,42.125
NetR200_U_LedMatrixPixel14_2: R200_U_LedMatrixPixel14.2 U200_U_LedMatrixPixel14.1 | length 3.3
  Top Layer w0.2: v1(31.125,43.677) 31.125,43.65 31.15,43.625 31.378,43.625 31.382,43.629 32.252,43.629 U200_U_LedMatrixPixel14.1@32.256,43.625
  Bottom Layer w0.2: v1(31.125,43.677) 30.975,43.527 30.975,42.975 31.825,42.125 R200_U_LedMatrixPixel14.2@32.031,42.125
NetR200_U_LedMatrixPixel15_1: R200_U_LedMatrixPixel15.1 U200_U_LedMatrixPixel22.6 | length 4.3
  Top Layer w0.254: v1(3,36.5) 3,34.281 U200_U_LedMatrixPixel22.6@3.656,33.625
  Bottom Layer w0.254: v1(3,36.5) 3.256,36.5 R200_U_LedMatrixPixel15.1@3.881,37.125
NetR200_U_LedMatrixPixel15_2: R200_U_LedMatrixPixel15.2 U200_U_LedMatrixPixel15.1 | length 3.3
  Top Layer w0.2: v1(1.125,38.677) 1.125,38.65 1.15,38.625 1.378,38.625 1.382,38.629 2.252,38.629 U200_U_LedMatrixPixel15.1@2.256,38.625
  Bottom Layer w0.2: v1(1.125,38.677) 0.975,38.527 0.975,37.975 1.825,37.125 R200_U_LedMatrixPixel15.2@2.031,37.125
NetR200_U_LedMatrixPixel16_1: R200_U_LedMatrixPixel16.1 U200_U_LedMatrixPixel23.6 | length 4.3
  Top Layer w0.254: v1(8,36.5) 8,34.281 U200_U_LedMatrixPixel23.6@8.656,33.625
  Bottom Layer w0.254: v1(8,36.5) 8.256,36.5 R200_U_LedMatrixPixel16.1@8.881,37.125
NetR200_U_LedMatrixPixel16_2: R200_U_LedMatrixPixel16.2 U200_U_LedMatrixPixel16.1 | length 3.3
  Top Layer w0.2: v1(6.125,38.677) 6.125,38.65 6.15,38.625 6.378,38.625 6.382,38.629 7.252,38.629 U200_U_LedMatrixPixel16.1@7.256,38.625
  Bottom Layer w0.2: v1(6.125,38.677) 5.975,38.527 5.975,37.975 6.825,37.125 R200_U_LedMatrixPixel16.2@7.031,37.125
NetR200_U_LedMatrixPixel17_1: R200_U_LedMatrixPixel17.1 U200_U_LedMatrixPixel24.6 | length 4.3
  Top Layer w0.254: v1(13,36.5) 13,34.281 U200_U_LedMatrixPixel24.6@13.656,33.625
  Bottom Layer w0.254: v1(13,36.5) 13.256,36.5 R200_U_LedMatrixPixel17.1@13.881,37.125
NetR200_U_LedMatrixPixel17_2: R200_U_LedMatrixPixel17.2 U200_U_LedMatrixPixel17.1 | length 3.3
  Top Layer w0.2: v1(11.125,38.677) 11.125,38.65 11.15,38.625 11.378,38.625 11.382,38.629 12.252,38.629 U200_U_LedMatrixPixel17.1@12.256,38.625
  Bottom Layer w0.2: v1(11.125,38.677) 10.975,38.527 10.975,37.975 11.825,37.125 R200_U_LedMatrixPixel17.2@12.031,37.125
NetR200_U_LedMatrixPixel18_1: R200_U_LedMatrixPixel18.1 U200_U_LedMatrixPixel25.6 | length 4.3
  Top Layer w0.254: v1(18,36.5) 18,34.281 U200_U_LedMatrixPixel25.6@18.656,33.625
  Bottom Layer w0.254: v1(18,36.5) 18.256,36.5 R200_U_LedMatrixPixel18.1@18.881,37.125
NetR200_U_LedMatrixPixel18_2: R200_U_LedMatrixPixel18.2 U200_U_LedMatrixPixel18.1 | length 3.3
  Top Layer w0.2: v1(16.125,38.677) 16.125,38.65 16.15,38.625 16.378,38.625 16.382,38.629 17.252,38.629 U200_U_LedMatrixPixel18.1@17.256,38.625
  Bottom Layer w0.2: v1(16.125,38.677) 15.975,38.527 15.975,37.975 16.825,37.125 R200_U_LedMatrixPixel18.2@17.031,37.125
NetR200_U_LedMatrixPixel19_1: R200_U_LedMatrixPixel19.1 U200_U_LedMatrixPixel26.6 | length 4.3
  Top Layer w0.254: v1(23,36.5) 23,34.281 U200_U_LedMatrixPixel26.6@23.656,33.625
  Bottom Layer w0.254: v1(23,36.5) 23.256,36.5 R200_U_LedMatrixPixel19.1@23.881,37.125
NetR200_U_LedMatrixPixel19_2: R200_U_LedMatrixPixel19.2 U200_U_LedMatrixPixel19.1 | length 3.3
  Top Layer w0.2: v1(21.125,38.677) 21.125,38.65 21.15,38.625 21.378,38.625 21.382,38.629 22.252,38.629 U200_U_LedMatrixPixel19.1@22.256,38.625
  Bottom Layer w0.2: v1(21.125,38.677) 20.975,38.527 20.975,37.975 21.825,37.125 R200_U_LedMatrixPixel19.2@22.031,37.125
NetR200_U_LedMatrixPixel20_1: R200_U_LedMatrixPixel20.1 U200_U_LedMatrixPixel27.6 | length 4.3
  Top Layer w0.254: v1(28,36.5) 28,34.281 U200_U_LedMatrixPixel27.6@28.656,33.625
  Bottom Layer w0.254: v1(28,36.5) 28.256,36.5 R200_U_LedMatrixPixel20.1@28.881,37.125
NetR200_U_LedMatrixPixel20_2: R200_U_LedMatrixPixel20.2 U200_U_LedMatrixPixel20.1 | length 3.3
  Top Layer w0.2: v1(26.125,38.677) 26.125,38.65 26.15,38.625 26.378,38.625 26.382,38.629 27.252,38.629 U200_U_LedMatrixPixel20.1@27.256,38.625
  Bottom Layer w0.2: v1(26.125,38.677) 25.975,38.527 25.975,37.975 26.825,37.125 R200_U_LedMatrixPixel20.2@27.031,37.125
NetR200_U_LedMatrixPixel21_1: R200_U_LedMatrixPixel21.1 U200_U_LedMatrixPixel28.6 | length 4.3
  Top Layer w0.254: v1(33,36.5) 33,34.281 U200_U_LedMatrixPixel28.6@33.656,33.625
  Bottom Layer w0.254: v1(33,36.5) 33.256,36.5 R200_U_LedMatrixPixel21.1@33.881,37.125
NetR200_U_LedMatrixPixel21_2: R200_U_LedMatrixPixel21.2 U200_U_LedMatrixPixel21.1 | length 3.3
  Top Layer w0.2: v1(31.125,38.677) 31.125,38.65 31.15,38.625 31.378,38.625 31.382,38.629 32.252,38.629 U200_U_LedMatrixPixel21.1@32.256,38.625
  Bottom Layer w0.2: v1(31.125,38.677) 30.975,38.527 30.975,37.975 31.825,37.125 R200_U_LedMatrixPixel21.2@32.031,37.125
NetR200_U_LedMatrixPixel22_1: R200_U_LedMatrixPixel22.1 U200_U_LedMatrixPixel29.6 | length 4.3
  Top Layer w0.254: v1(3,31.5) 3,29.281 U200_U_LedMatrixPixel29.6@3.656,28.625
  Bottom Layer w0.254: v1(3,31.5) 3.256,31.5 R200_U_LedMatrixPixel22.1@3.881,32.125
NetR200_U_LedMatrixPixel22_2: R200_U_LedMatrixPixel22.2 U200_U_LedMatrixPixel22.1 | length 3.3
  Top Layer w0.2: v1(1.125,33.677) 1.125,33.65 1.15,33.625 1.378,33.625 1.382,33.629 2.252,33.629 U200_U_LedMatrixPixel22.1@2.256,33.625
  Bottom Layer w0.2: v1(1.125,33.677) 0.975,33.527 0.975,32.975 1.825,32.125 R200_U_LedMatrixPixel22.2@2.031,32.125
NetR200_U_LedMatrixPixel23_1: R200_U_LedMatrixPixel23.1 U200_U_LedMatrixPixel30.6 | length 4.3
  Top Layer w0.254: v1(8,31.5) 8,29.281 U200_U_LedMatrixPixel30.6@8.656,28.625
  Bottom Layer w0.254: v1(8,31.5) 8.256,31.5 R200_U_LedMatrixPixel23.1@8.881,32.125
NetR200_U_LedMatrixPixel23_2: R200_U_LedMatrixPixel23.2 U200_U_LedMatrixPixel23.1 | length 3.3
  Top Layer w0.2: v1(6.125,33.677) 6.125,33.65 6.15,33.625 6.378,33.625 6.382,33.629 7.252,33.629 U200_U_LedMatrixPixel23.1@7.256,33.625
  Bottom Layer w0.2: v1(6.125,33.677) 5.975,33.527 5.975,32.975 6.825,32.125 R200_U_LedMatrixPixel23.2@7.031,32.125
NetR200_U_LedMatrixPixel24_1: R200_U_LedMatrixPixel24.1 U200_U_LedMatrixPixel31.6 | length 4.3
  Top Layer w0.254: v1(13,31.5) 13,29.281 U200_U_LedMatrixPixel31.6@13.656,28.625
  Bottom Layer w0.254: v1(13,31.5) 13.256,31.5 R200_U_LedMatrixPixel24.1@13.881,32.125
NetR200_U_LedMatrixPixel24_2: R200_U_LedMatrixPixel24.2 U200_U_LedMatrixPixel24.1 | length 3.3
  Top Layer w0.2: v1(11.125,33.677) 11.125,33.65 11.15,33.625 11.378,33.625 11.382,33.629 12.252,33.629 U200_U_LedMatrixPixel24.1@12.256,33.625
  Bottom Layer w0.2: v1(11.125,33.677) 10.975,33.527 10.975,32.975 11.825,32.125 R200_U_LedMatrixPixel24.2@12.031,32.125
NetR200_U_LedMatrixPixel25_1: R200_U_LedMatrixPixel25.1 U200_U_LedMatrixPixel32.6 | length 4.3
  Top Layer w0.254: v1(18,31.5) 18,29.281 U200_U_LedMatrixPixel32.6@18.656,28.625
  Bottom Layer w0.254: v1(18,31.5) 18.256,31.5 R200_U_LedMatrixPixel25.1@18.881,32.125
NetR200_U_LedMatrixPixel25_2: R200_U_LedMatrixPixel25.2 U200_U_LedMatrixPixel25.1 | length 3.3
  Top Layer w0.2: v1(16.125,33.677) 16.125,33.65 16.15,33.625 16.378,33.625 16.382,33.629 17.252,33.629 U200_U_LedMatrixPixel25.1@17.256,33.625
  Bottom Layer w0.2: v1(16.125,33.677) 15.975,33.527 15.975,32.975 16.825,32.125 R200_U_LedMatrixPixel25.2@17.031,32.125
NetR200_U_LedMatrixPixel26_1: R200_U_LedMatrixPixel26.1 U200_U_LedMatrixPixel33.6 | length 4.3
  Top Layer w0.254: v1(23,31.5) 23,29.281 U200_U_LedMatrixPixel33.6@23.656,28.625
  Bottom Layer w0.254: v1(23,31.5) 23.256,31.5 R200_U_LedMatrixPixel26.1@23.881,32.125
NetR200_U_LedMatrixPixel26_2: R200_U_LedMatrixPixel26.2 U200_U_LedMatrixPixel26.1 | length 3.3
  Top Layer w0.2: v1(21.125,33.677) 21.125,33.65 21.15,33.625 21.378,33.625 21.382,33.629 22.252,33.629 U200_U_LedMatrixPixel26.1@22.256,33.625
  Bottom Layer w0.2: v1(21.125,33.677) 20.975,33.527 20.975,32.975 21.825,32.125 R200_U_LedMatrixPixel26.2@22.031,32.125
NetR200_U_LedMatrixPixel27_1: R200_U_LedMatrixPixel27.1 U200_U_LedMatrixPixel34.6 | length 4.3
  Top Layer w0.254: v1(28,31.5) 28,29.281 U200_U_LedMatrixPixel34.6@28.656,28.625
  Bottom Layer w0.254: v1(28,31.5) 28.256,31.5 R200_U_LedMatrixPixel27.1@28.881,32.125
NetR200_U_LedMatrixPixel27_2: R200_U_LedMatrixPixel27.2 U200_U_LedMatrixPixel27.1 | length 3.3
  Top Layer w0.2: v1(26.125,33.677) 26.125,33.65 26.15,33.625 26.378,33.625 26.382,33.629 27.252,33.629 U200_U_LedMatrixPixel27.1@27.256,33.625
  Bottom Layer w0.2: v1(26.125,33.677) 25.975,33.527 25.975,32.975 26.825,32.125 R200_U_LedMatrixPixel27.2@27.031,32.125
NetR200_U_LedMatrixPixel28_1: R200_U_LedMatrixPixel28.1 U200_U_LedMatrixPixel35.6 | length 4.3
  Top Layer w0.254: v1(33,31.5) 33,29.281 U200_U_LedMatrixPixel35.6@33.656,28.625
  Bottom Layer w0.254: v1(33,31.5) 33.256,31.5 R200_U_LedMatrixPixel28.1@33.881,32.125
NetR200_U_LedMatrixPixel28_2: R200_U_LedMatrixPixel28.2 U200_U_LedMatrixPixel28.1 | length 3.3
  Top Layer w0.2: v1(31.125,33.677) 31.125,33.65 31.15,33.625 31.378,33.625 31.382,33.629 32.252,33.629 U200_U_LedMatrixPixel28.1@32.256,33.625
  Bottom Layer w0.2: v1(31.125,33.677) 30.975,33.527 30.975,32.975 31.825,32.125 R200_U_LedMatrixPixel28.2@32.031,32.125
NetR200_U_LedMatrixPixel29_1: R200_U_LedMatrixPixel29.1 U200_U_LedMatrixPixel36.6 | length 4.3
  Top Layer w0.254: v1(3,26.5) 3,24.281 U200_U_LedMatrixPixel36.6@3.656,23.625
  Bottom Layer w0.254: v1(3,26.5) 3.256,26.5 R200_U_LedMatrixPixel29.1@3.881,27.125
NetR200_U_LedMatrixPixel29_2: R200_U_LedMatrixPixel29.2 U200_U_LedMatrixPixel29.1 | length 3.3
  Top Layer w0.2: v1(1.125,28.677) 1.125,28.65 1.15,28.625 1.378,28.625 1.382,28.629 2.252,28.629 U200_U_LedMatrixPixel29.1@2.256,28.625
  Bottom Layer w0.2: v1(1.125,28.677) 0.975,28.527 0.975,27.975 1.825,27.125 R200_U_LedMatrixPixel29.2@2.031,27.125
NetR200_U_LedMatrixPixel30_1: R200_U_LedMatrixPixel30.1 U200_U_LedMatrixPixel37.6 | length 4.3
  Top Layer w0.254: v1(8,26.5) 8,24.281 U200_U_LedMatrixPixel37.6@8.656,23.625
  Bottom Layer w0.254: v1(8,26.5) 8.256,26.5 R200_U_LedMatrixPixel30.1@8.881,27.125
NetR200_U_LedMatrixPixel30_2: R200_U_LedMatrixPixel30.2 U200_U_LedMatrixPixel30.1 | length 3.3
  Top Layer w0.2: v1(6.125,28.677) 6.125,28.65 6.15,28.625 6.378,28.625 6.382,28.629 7.252,28.629 U200_U_LedMatrixPixel30.1@7.256,28.625
  Bottom Layer w0.2: v1(6.125,28.677) 5.975,28.527 5.975,27.975 6.825,27.125 R200_U_LedMatrixPixel30.2@7.031,27.125
NetR200_U_LedMatrixPixel31_1: R200_U_LedMatrixPixel31.1 U200_U_LedMatrixPixel38.6 | length 4.3
  Top Layer w0.254: v1(13,26.5) 13,24.281 U200_U_LedMatrixPixel38.6@13.656,23.625
  Bottom Layer w0.254: v1(13,26.5) 13.256,26.5 R200_U_LedMatrixPixel31.1@13.881,27.125
NetR200_U_LedMatrixPixel31_2: R200_U_LedMatrixPixel31.2 U200_U_LedMatrixPixel31.1 | length 3.3
  Top Layer w0.2: v1(11.125,28.677) 11.125,28.65 11.15,28.625 11.378,28.625 11.382,28.629 12.252,28.629 U200_U_LedMatrixPixel31.1@12.256,28.625
  Bottom Layer w0.2: v1(11.125,28.677) 10.975,28.527 10.975,27.975 11.825,27.125 R200_U_LedMatrixPixel31.2@12.031,27.125
NetR200_U_LedMatrixPixel32_1: R200_U_LedMatrixPixel32.1 U200_U_LedMatrixPixel39.6 | length 4.3
  Top Layer w0.254: v1(18,26.5) 18,24.281 U200_U_LedMatrixPixel39.6@18.656,23.625
  Bottom Layer w0.254: v1(18,26.5) 18.256,26.5 R200_U_LedMatrixPixel32.1@18.881,27.125
NetR200_U_LedMatrixPixel32_2: R200_U_LedMatrixPixel32.2 U200_U_LedMatrixPixel32.1 | length 3.3
  Top Layer w0.2: v1(16.125,28.677) 16.125,28.65 16.15,28.625 16.378,28.625 16.382,28.629 17.252,28.629 U200_U_LedMatrixPixel32.1@17.256,28.625
  Bottom Layer w0.2: v1(16.125,28.677) 15.975,28.527 15.975,27.975 16.825,27.125 R200_U_LedMatrixPixel32.2@17.031,27.125
NetR200_U_LedMatrixPixel33_1: R200_U_LedMatrixPixel33.1 U200_U_LedMatrixPixel40.6 | length 4.3
  Top Layer w0.254: v1(23,26.5) 23,24.281 U200_U_LedMatrixPixel40.6@23.656,23.625
  Bottom Layer w0.254: v1(23,26.5) 23.256,26.5 R200_U_LedMatrixPixel33.1@23.881,27.125
NetR200_U_LedMatrixPixel33_2: R200_U_LedMatrixPixel33.2 U200_U_LedMatrixPixel33.1 | length 3.3
  Top Layer w0.2: v1(21.125,28.677) 21.125,28.65 21.15,28.625 21.378,28.625 21.382,28.629 22.252,28.629 U200_U_LedMatrixPixel33.1@22.256,28.625
  Bottom Layer w0.2: v1(21.125,28.677) 20.975,28.527 20.975,27.975 21.825,27.125 R200_U_LedMatrixPixel33.2@22.031,27.125
NetR200_U_LedMatrixPixel34_1: R200_U_LedMatrixPixel34.1 U200_U_LedMatrixPixel41.6 | length 4.3
  Top Layer w0.254: v1(28,26.5) 28,24.281 U200_U_LedMatrixPixel41.6@28.656,23.625
  Bottom Layer w0.254: v1(28,26.5) 28.256,26.5 R200_U_LedMatrixPixel34.1@28.881,27.125
NetR200_U_LedMatrixPixel34_2: R200_U_LedMatrixPixel34.2 U200_U_LedMatrixPixel34.1 | length 3.3
  Top Layer w0.2: v1(26.125,28.677) 26.125,28.65 26.15,28.625 26.378,28.625 26.382,28.629 27.252,28.629 U200_U_LedMatrixPixel34.1@27.256,28.625
  Bottom Layer w0.2: v1(26.125,28.677) 25.975,28.527 25.975,27.975 26.825,27.125 R200_U_LedMatrixPixel34.2@27.031,27.125
NetR200_U_LedMatrixPixel35_1: R200_U_LedMatrixPixel35.1 U200_U_LedMatrixPixel42.6 | length 4.3
  Top Layer w0.254: v1(33,26.5) 33,24.281 U200_U_LedMatrixPixel42.6@33.656,23.625
  Bottom Layer w0.254: v1(33,26.5) 33.256,26.5 R200_U_LedMatrixPixel35.1@33.881,27.125
NetR200_U_LedMatrixPixel35_2: R200_U_LedMatrixPixel35.2 U200_U_LedMatrixPixel35.1 | length 3.3
  Top Layer w0.2: v1(31.125,28.677) 31.125,28.65 31.15,28.625 31.378,28.625 31.382,28.629 32.252,28.629 U200_U_LedMatrixPixel35.1@32.256,28.625
  Bottom Layer w0.2: v1(31.125,28.677) 30.975,28.527 30.975,27.975 31.825,27.125 R200_U_LedMatrixPixel35.2@32.031,27.125